# Altium PCB PCB1.PcbDoc (part 1 of 2)
Units mm, origin at the board's own origin, x right, y up, seen from the top; angles counter-clockwise.
Board outline 33.15 x 40.75 mm, 6 copper layers (Top Layer, GND, Signal Layer 3, POWER, Signal Layer 1, Bottom Layer), stack 1.231 mm thick; 110 components, 115 nets, 492 pads, 238 vias.
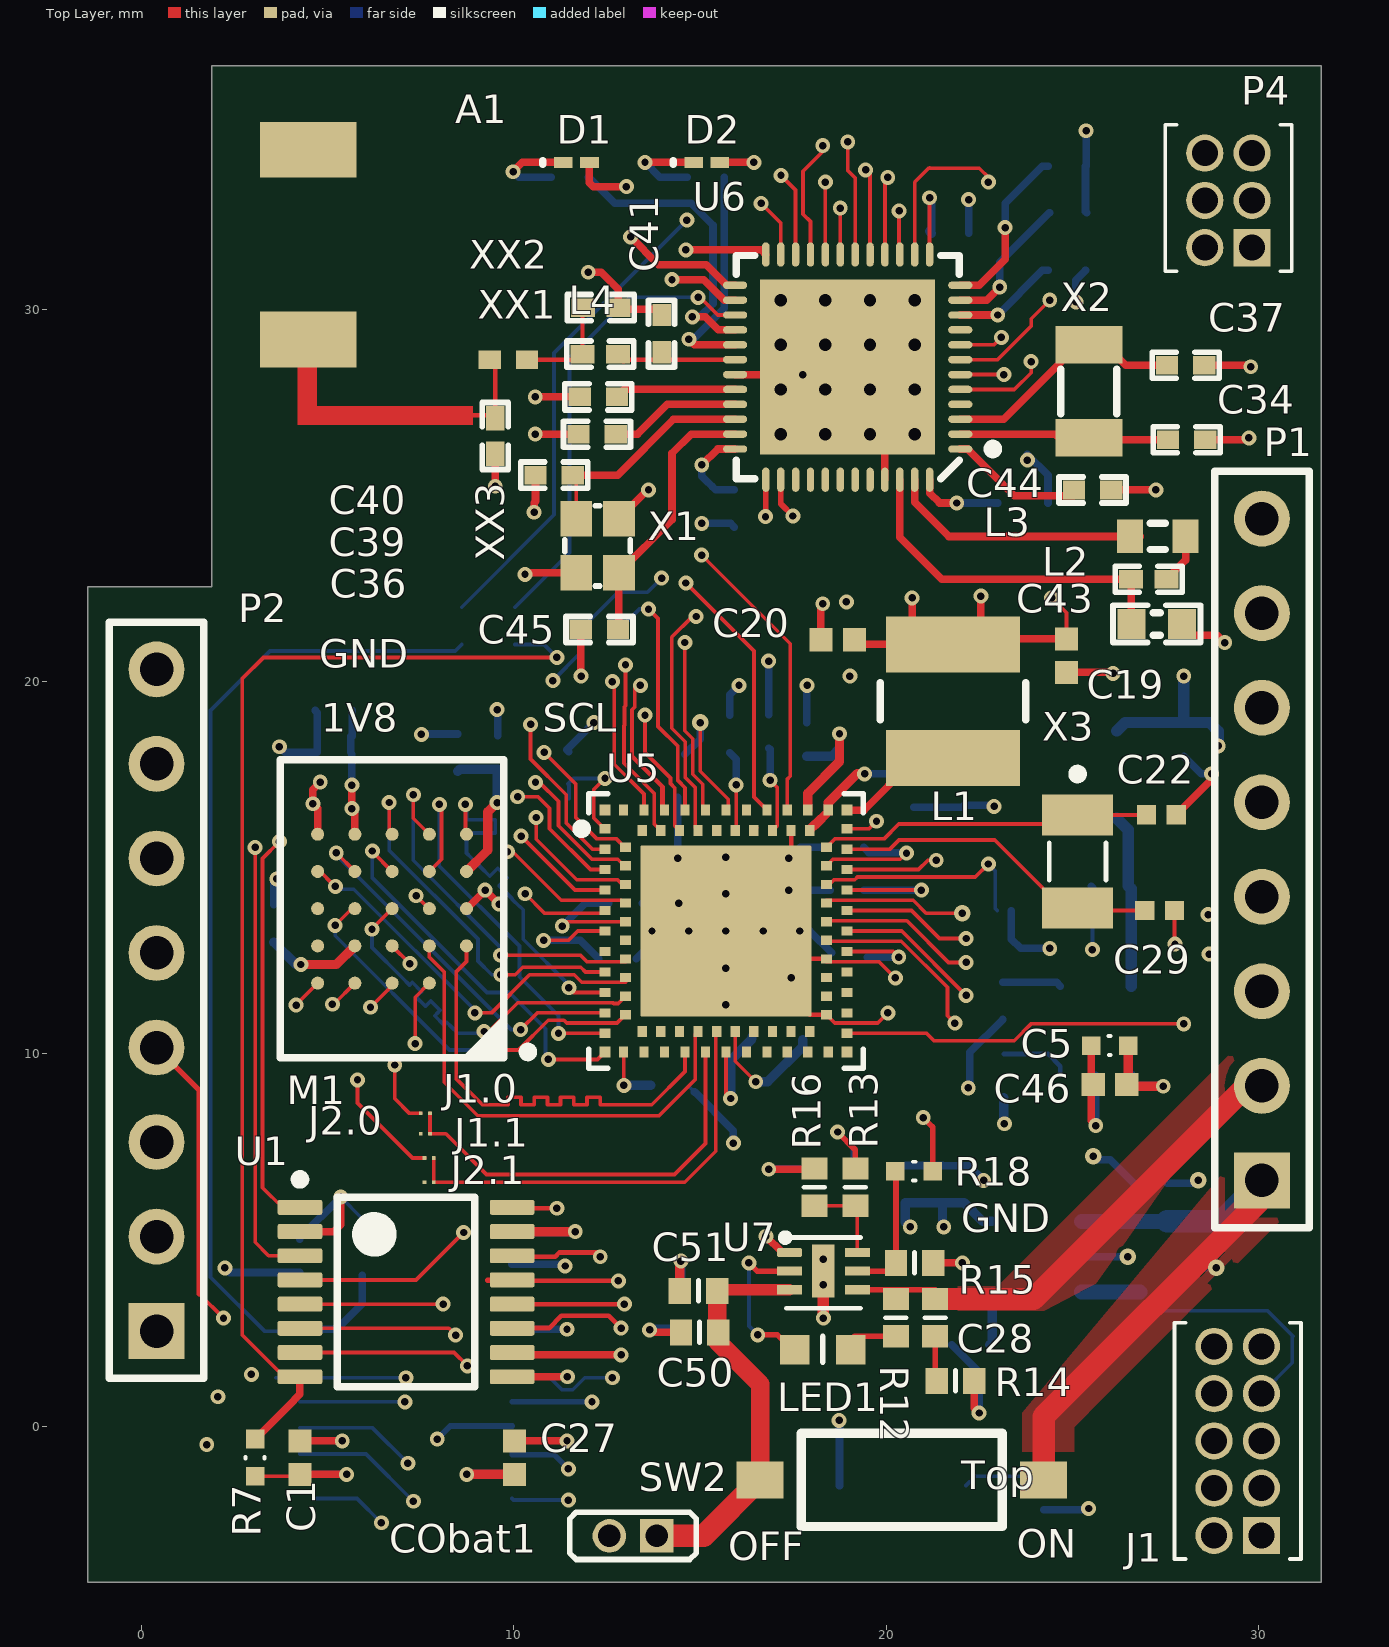
[diagram p0: Top Layer view]
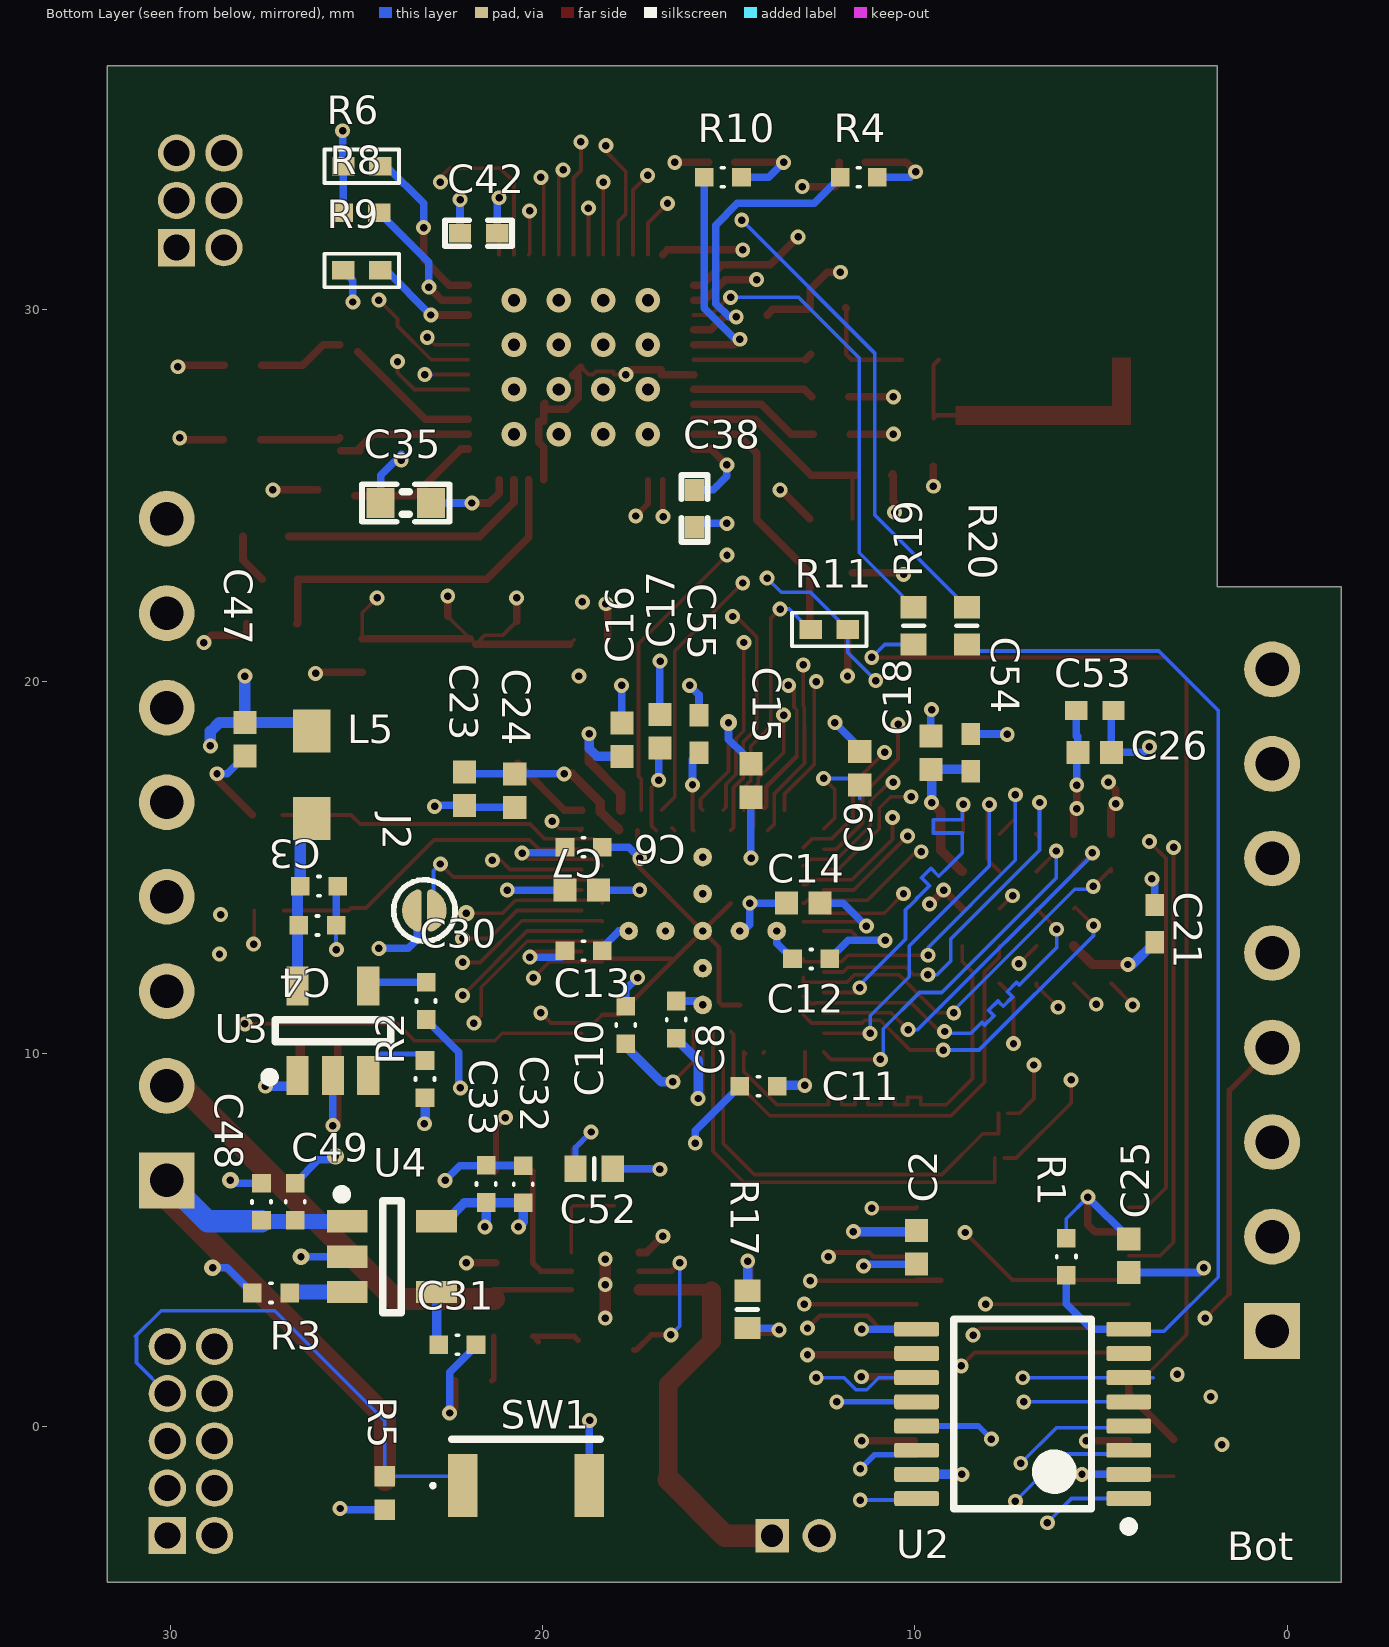
[diagram p1: Bottom Layer view, seen from below]
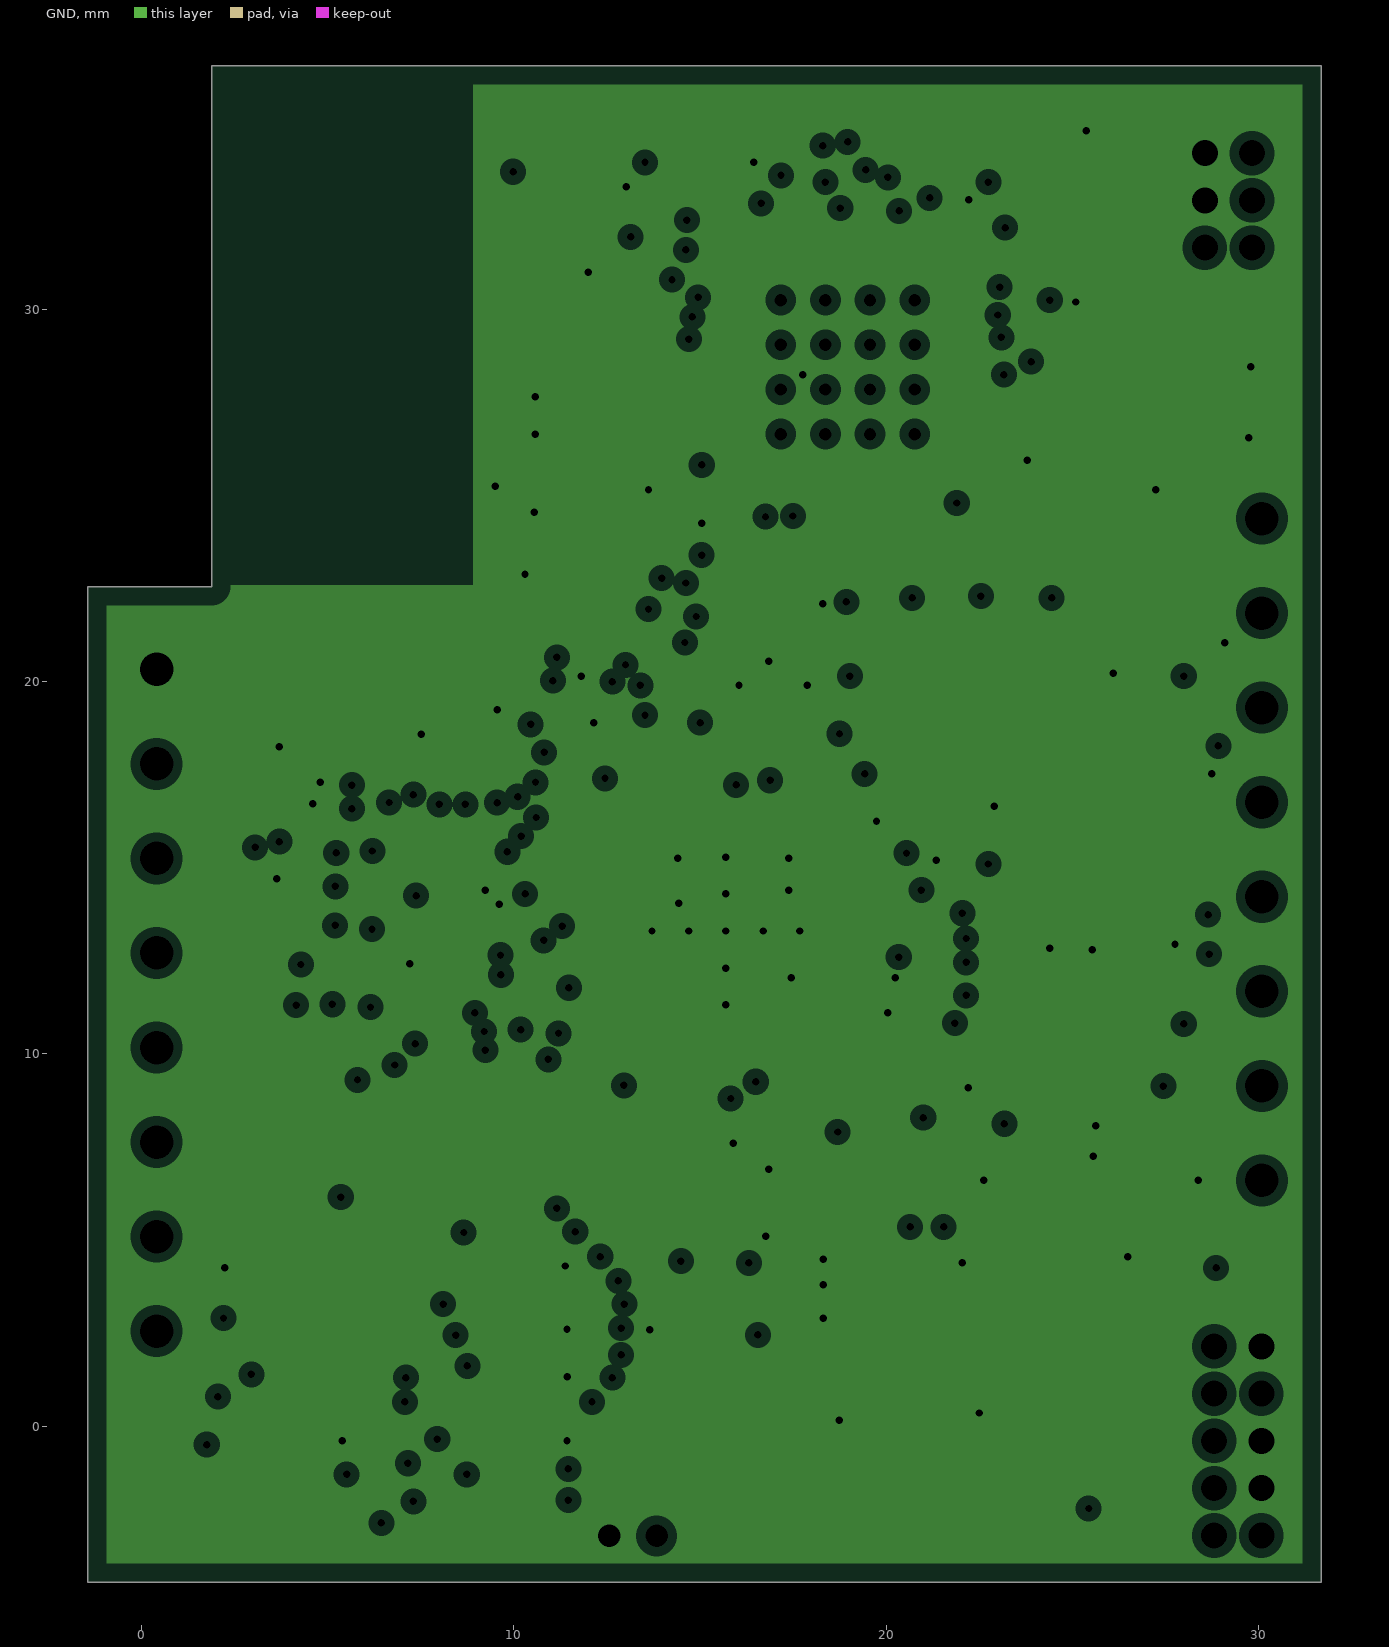
[diagram p2: GND, clearances drawn from the general rule]
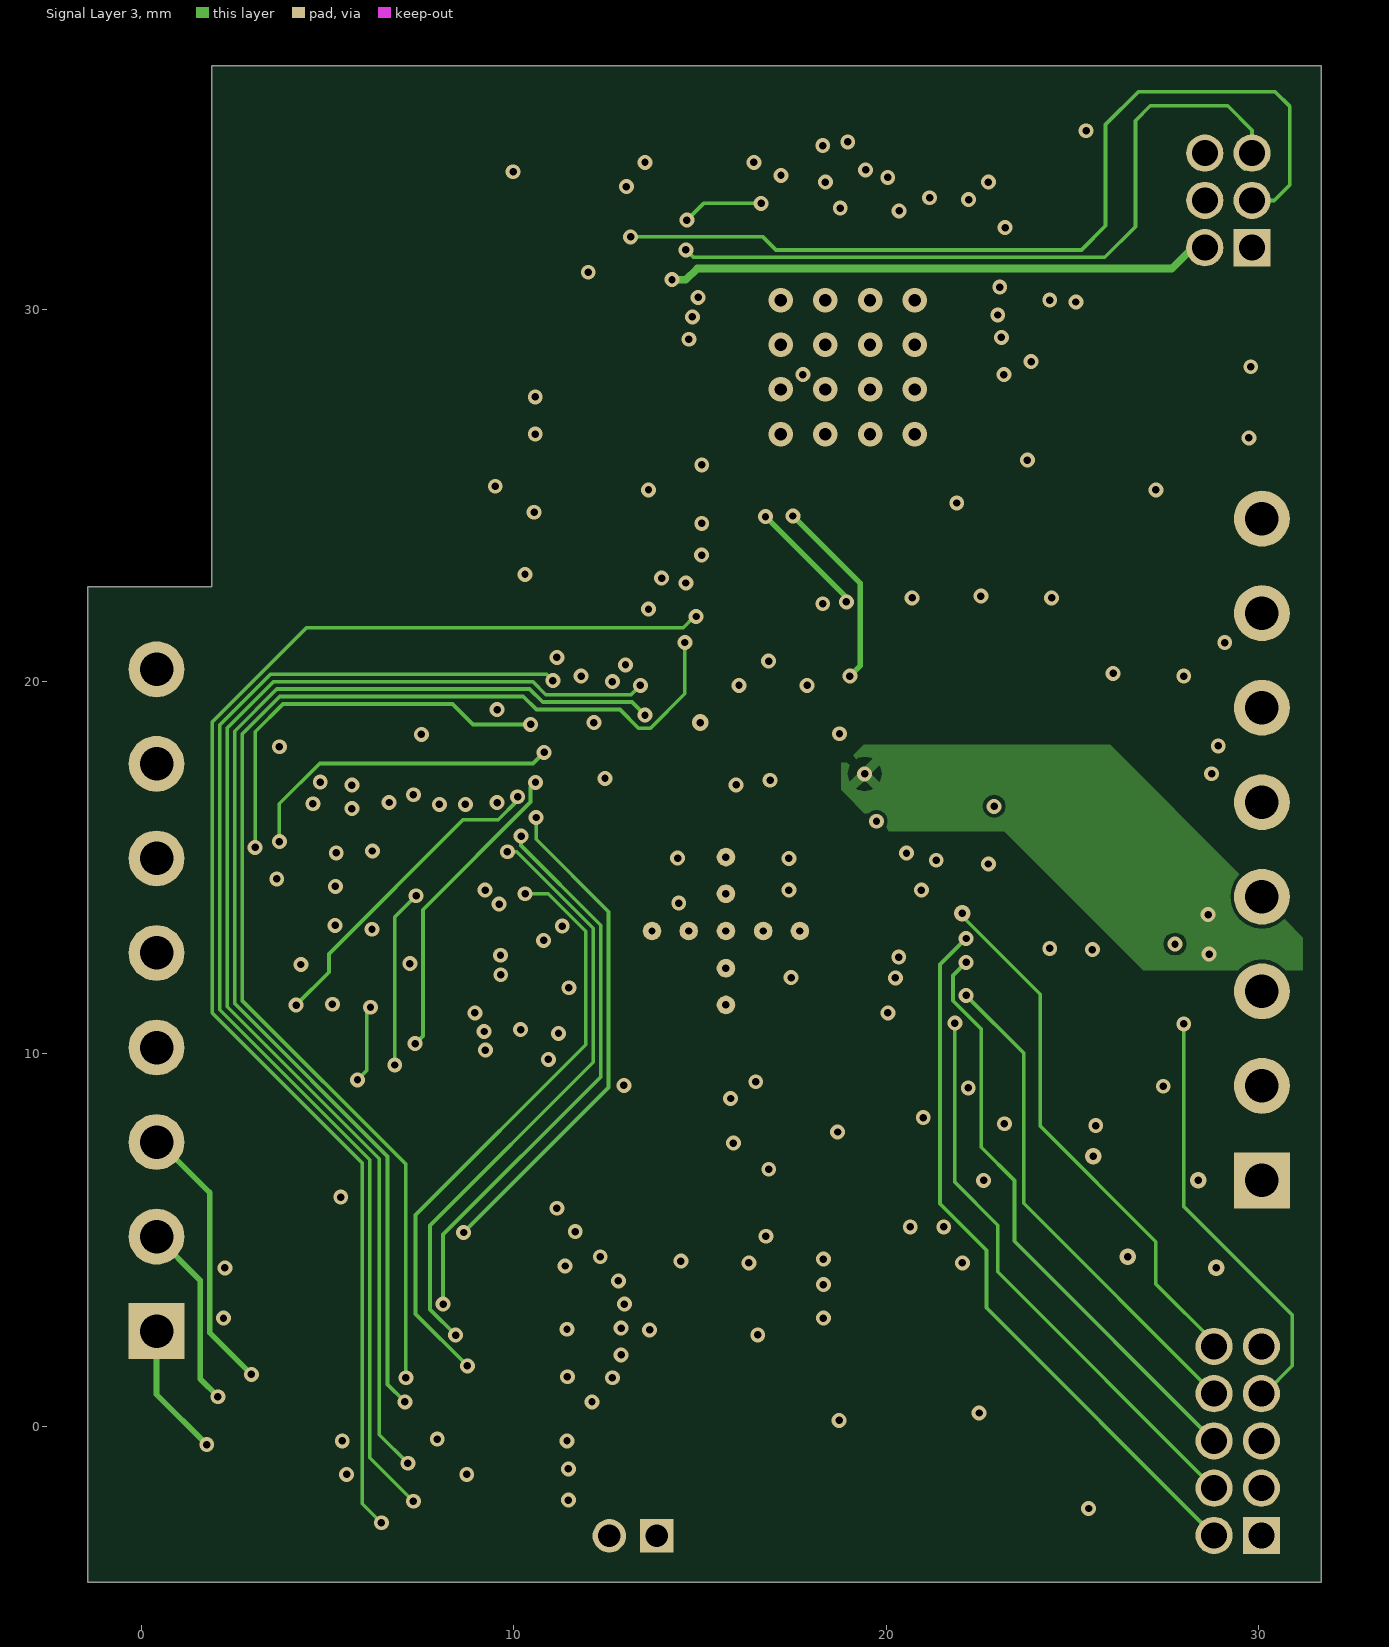
[diagram p3: Signal Layer 3]
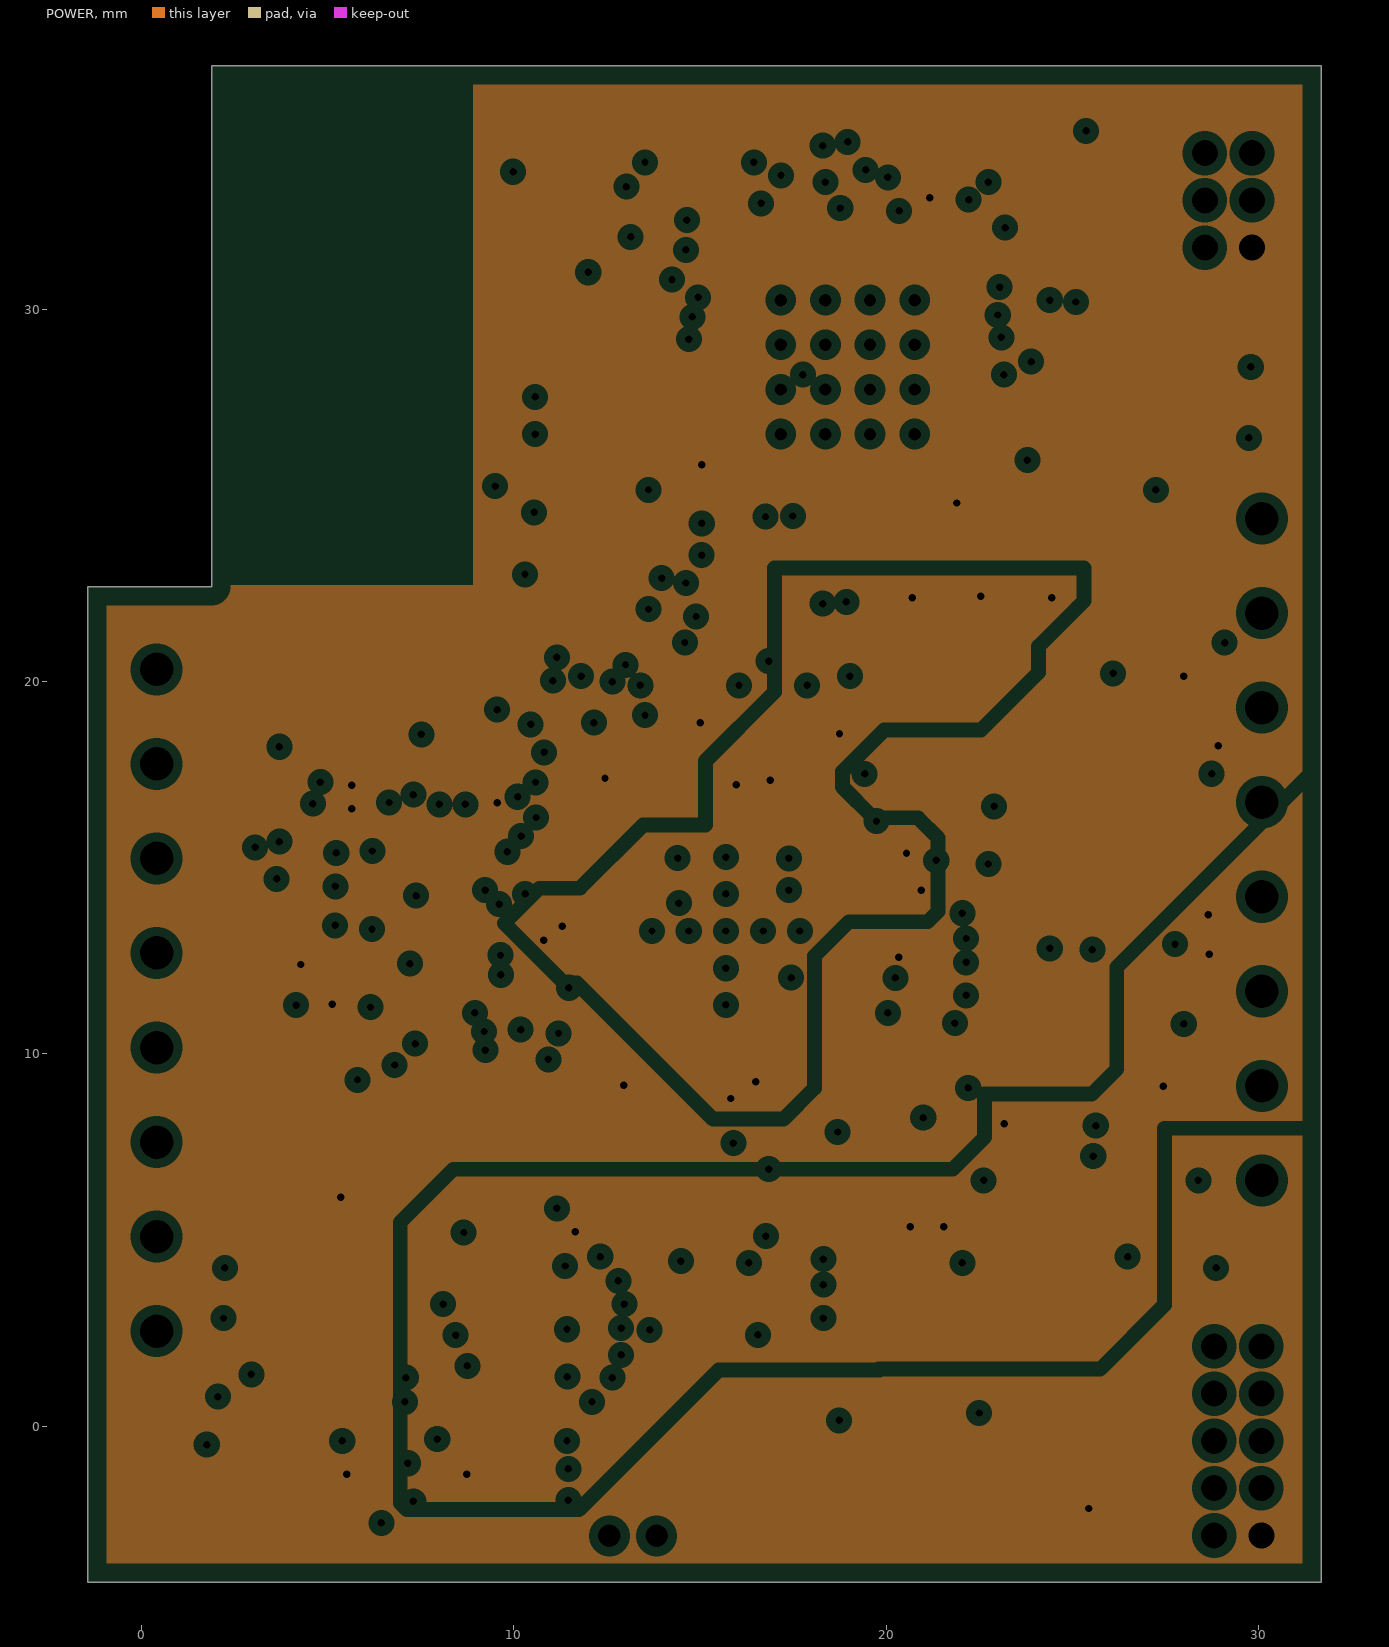
[diagram p4: POWER, clearances drawn from the general rule]
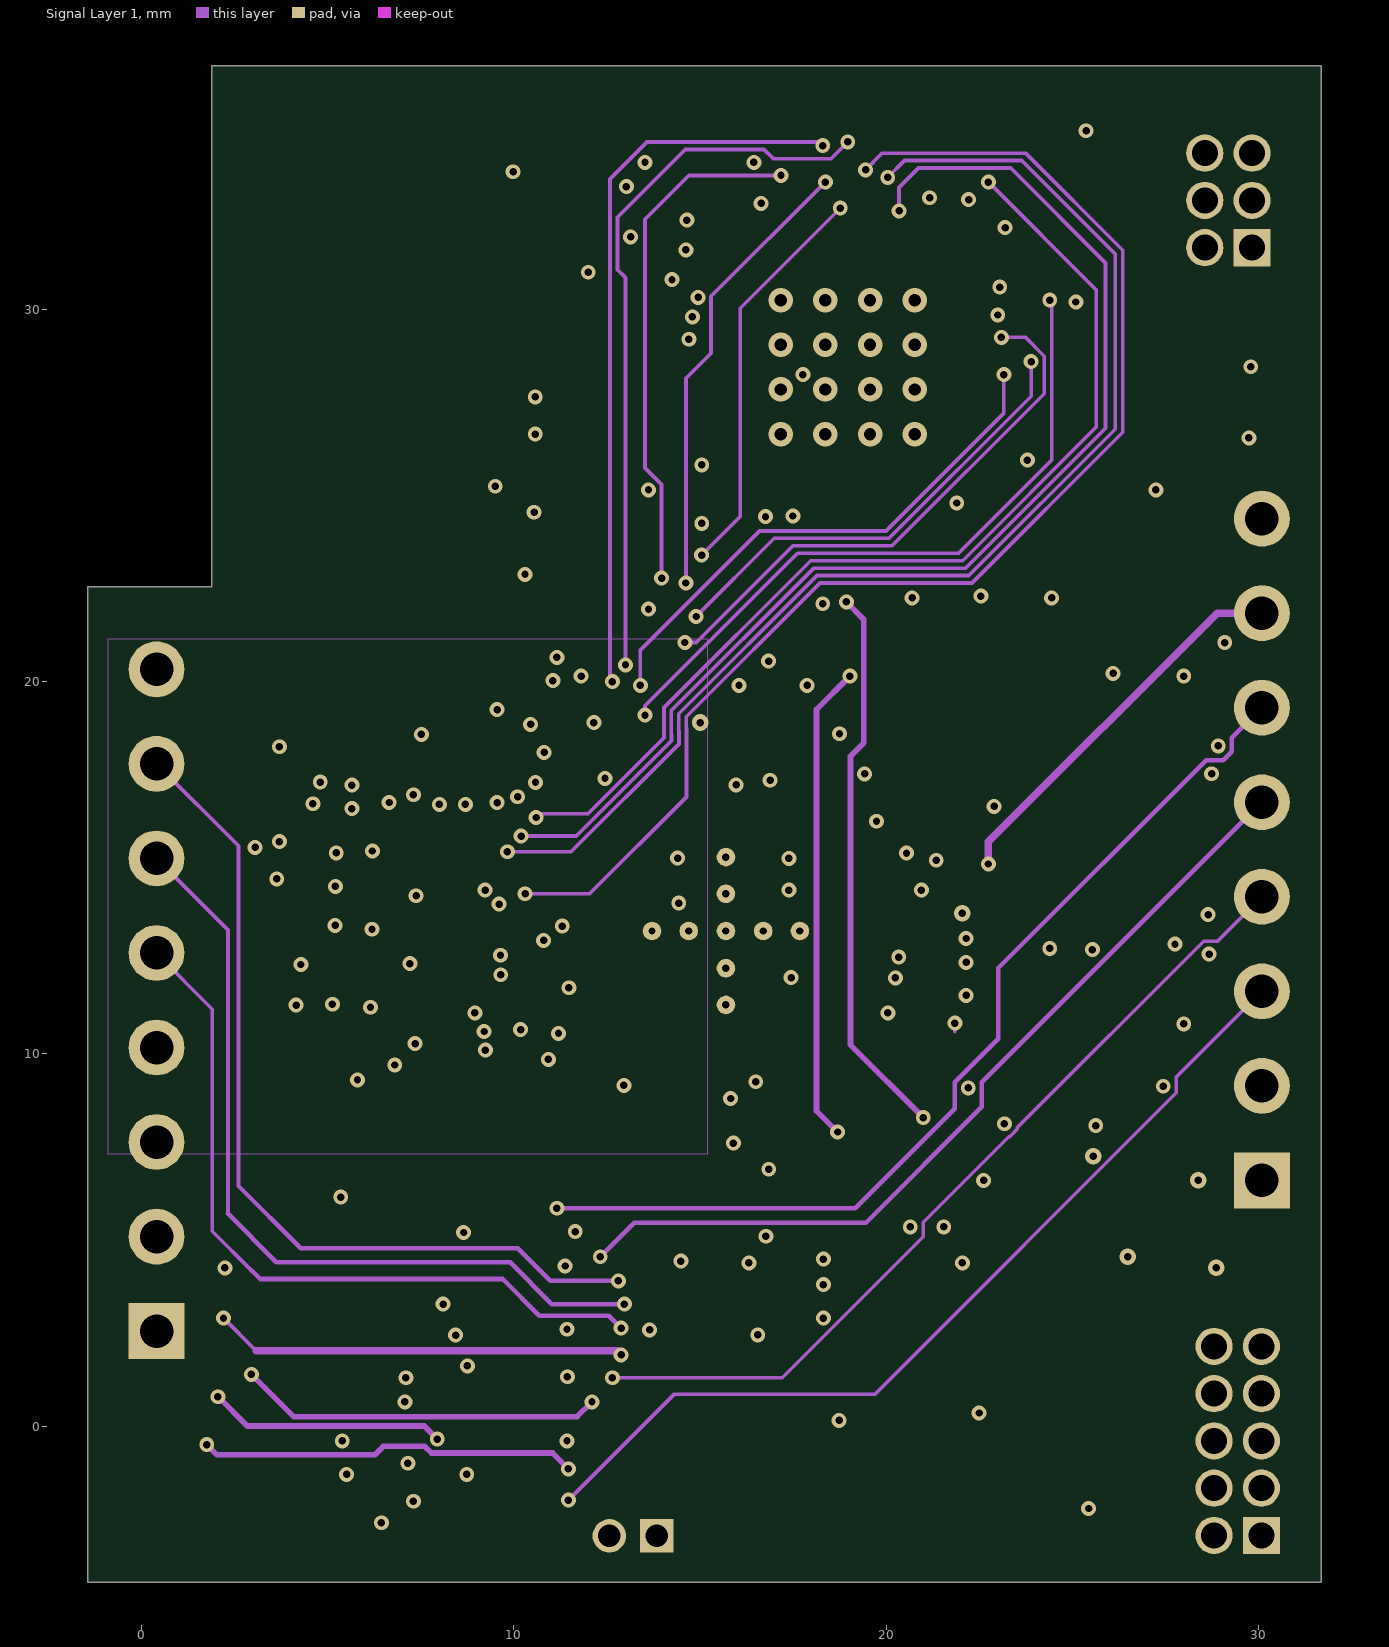
[diagram p5: Signal Layer 1]

## Layer stack, top to bottom
Top Solder: solder mask 0.0102, Solder Resist, Dk 3.5
Top Layer: signal copper 0.0356
Dielectric 1: core 0.254, FR-4, Dk 4.2
GND: plane copper 0.036, net GND
Dielectric 3: prepreg 0.127, Dk 4.2
Signal Layer 3: signal copper 0.036
Dielectric 5: core 0.254, Dk 4.2
POWER: plane copper 0.036, net (Multiple Nets)
Dielectric 2: prepreg 0.127, Dk 4.2
Signal Layer 1: signal copper 0.036
Dielectric 6: core 0.254, Dk 4.2
Bottom Layer: signal copper 0.0356
Bottom Solder: solder mask 0.0102, Solder Resist, Dk 3.5

## Board outline
-1.45,22.55 -1.45,-4.2 31.7,-4.2 31.7,36.55 1.879,36.55 1.879,22.55

## Design rules (kind name [scope] priority, off if disabled: settings)
Clearance [All] p1: gap=0.1
ComponentClearance [All] p1: gap=0.127 collisioncheckmode=3 verticalgap=0.127 showdistances=FALSE
DiffPairsRouting [InNetClass('CLOCKDIFF')] p1: maxlimit=2 minlimit=0.2 mostfreqgap=0.2 toplayer_minwidth=0.1 toplayer_maxwidth=0.35 toplayer_prefwidth=0.1 midlayer1_minwidth=0.1 midlayer1_maxwidth=0.35 midlayer1_prefwidth=0.1 midlayer2_minwidth=0.1 midlayer2_maxwidth=0.35 midlayer2_prefwidth=0.1 bottomlayer_minwidth=0.1 bottomlayer_maxwidth=0.35 bottomlayer_prefwidth=0.1 maxuncoupledlength=40
HoleSize [All] p1: absolutevalues=TRUE maxlimit=2540 minlimit=0.2 maxpercent=80.000 minpercent=20.000
HoleToHoleClearance [All] p1: gap=0.102 allowstackedmicrovias=TRUE
MatchedLengths MatchedD07 [InNetClass('D0_7')] p1: tolerance=1.27 checknetsindiffpair=FALSE checkdiffpairvsdiffpair=FALSE checkothers=TRUE
MatchedLengths [InNetClass('CLOCKDIFF')] p2: tolerance=0.254 checknetsindiffpair=FALSE checkdiffpairvsdiffpair=FALSE checkothers=TRUE
MinimumSolderMaskSliver [All] p1 off: minsoldermaskwidth=0.099
PlaneClearance [All] p1: clearance=0.25
PlaneConnect [All] p1: planeconnectstyle=Direct reliefexpansion=0.508 reliefentries=4 reliefconductorwidth=0.254 reliefairgap=0.254
PolygonConnect [All] p1: connectstyle=Relief reliefconductorwidth=0.254 reliefentries=4 polygonreliefangle="45 Angle" airgapwidth=0.254
RoutingLayers RoutingLayers_4 [All] p1: top layer_v5=TRUE mid layer 1_v5=TRUE mid layer 2_v5=TRUE bottom layer_v5=TRUE
RoutingLayers [All] p2: top layer_v5=TRUE mid layer 1_v5=TRUE mid layer 2_v5=TRUE bottom layer_v5=TRUE
RoutingVias [All] p1: holewidth=0.3 width=0.6 viastyle="Through Hole" minholewidth=0.2 minwidth=0.4 maxholewidth=0.508 maxwidth=0.762
SilkToSilkClearance [All] p1 off: silktosilkclearance=0.1
SilkToSolderMaskClearance [IsPad] p1 off: minsilkscreentomaskgap=0.1 clearancetoexposedcopper=TRUE
SolderMaskExpansion [All] p1: expansion=0.051
UnpouredPolygon [All] p1: allowunpoured=FALSE
Width [All] p1: maxlimit=3 minlimit=0.1 preferedwidth=0.15
19 further rules are at their usual default settings.

## Classes and differential pairs
net class RWDS_NET: HYPER.RWDS
component class GAPandPeripherals: C6 C7 C8 C9 C10 C11 C12 C13 C14 C15 C16 C17 C18 C19 C20 C21 C22 C23 C24 C26 C29 C53 C54 C55 J1 J1.0 J1.1 J2 J2.0 J2.1 L1 M1 R5 SW1 U5 X3
component class Power: C1 C2 C3 C4 C5 C25 C27 C30 C31 C32 C33 C46 C47 C48 C49 L5 P1 P2 R1 R2 R3 R7 U1 U2 U3 U4
net class POWER: 1V8 PULP_VCC VCOM VCOM_CF
component class Communications: A1 C34 C35 C36 C37 C38 C39 C40 C41 C42 C43 C44 C45 D1 D2 L2 L3 L4 P4 R4 R6 R8 R9 R10 R11 R18 R19 R20 U6 X1 X2 XX1 XX2 XX3
component class BatteryCharge: C28 C50 C51 C52 CObat1 LED1 R12 R13 R14 R15 R16 R17 SW2 U7
net class CLOCKDIFF: CK_N CK_P
net class D0_7: DQ0 DQ1 DQ2 DQ3 DQ4 DQ5 DQ6 DQ7 MEM_\R\S\T\O\1 MEM_INT1
differential pair CK: +CK_P -CK_N

## Components (designator, comment, footprint, x,y, rotation, side; value= is the part's Value field where it differs from the comment)
A1 "FR05-S1-N-0-102" ANTENNACHIP 4.476,29.84 r90 top
C1 "100nF" CAPC0402(1005)60_N 4.25,-0.85 r270 top
C2 "100nF" CAPC0402(1005)60_N 9.951,4.8 r270 bottom
C3 "Cap" "cap_0402_R - modified" 26.51,14.508 r180 bottom
C4 "Cap" "cap_0402_R - modified" 26.55,13.45 r180 bottom
C5 "Cap" "cap_0402_R - modified" 26.51,10.221 r180 top
C6 "100nF" "cap_0402_R - modified" 18.4,15.55 r0 bottom
C7 "100nF" CAPC0402(1005)60_N 18.95,14.4 r0 bottom
C8 "100nF" "cap_0402_R - modified" 16.409,11.42 r270 bottom
C9 "100nF" CAPC0402(1005)60_N 11.48,17.67 r270 bottom
C10 "100nF" "cap_0402_R - modified" 17.768,11.275 r270 bottom
C11 "100nF" "cap_0402_R - modified" 14.7,9.13 r180 bottom
C12 "100nF" "cap_0402_R - modified" 13.286,12.55 r180 bottom
C13 "100nF" "cap_0402_R - modified" 18.4,12.768 r0 bottom
C14 "100nF" CAPC0402(1005)60_N 13,14.05 r180 bottom
C15 "100nF" CAPC0402(1005)60_N 14.408,17.344 r90 bottom
C16 "100nF" CAPC0402(1005)60_N 17.873,18.443 r270 bottom
C17 "100nF" CAPC0402(1005)60_N 16.85,18.663 r270 bottom
C18 "100nF" CAPC0402(1005)60_N 9.57,18.094 r270 bottom
C19 "4.7uF" CAPC0402(1005)60_N 24.85,20.7 r90 top
C20 "100nF" CAPC0402(1005)60_N 18.7,21.125 r0 top
C21 "Cap Semi" 0402#1 3.55,13.5 r270 bottom
C22 "10pF" CAPC0402(1005)60_L 27.4,16.425 r180 top
C23 "4.7uF" CAPC0402(1005)60_N 22.1,17.125 r90 bottom
C24 "100nF" CAPC0402(1005)60_N 20.75,17.073 r90 bottom
C25 "100nF" CAPC0402(1005)60_N 4.254,4.575 r90 bottom
C26 "100nF" CAPC0402(1005)60_N 5.168,18.1 r0 bottom
C27 "100nF" CAPC0402(1005)60_N 10.015,-0.85 r90 top
C28 "C1005X5R1C105M050BC" 0402#2 21.317,2.913 r90 top
C29 "10pF" CAPC0402(1005)60_L 27.35,13.85 r180 top
C30 "C" "cap_0402_R - modified" 23.132,11.922 r270 bottom
C31 "Cap" "cap_0402_R - modified" 21.79,2.181 r0 bottom
C32 "Cap" "cap_0402_R - modified" 20.522,5.994 r90 bottom
C33 "Cap" "cap_0402_R - modified" 21.517,7.005 r270 bottom
C34 "12pF" CAPC1005X04L 28.077,26.5 r0 top
C35 "4.7µF" CAPC1608X06L 23.678,24.8 r0 bottom
C36 "12pF" CAPC1005X04L 11.082,25.55 r180 top
C37 "12pF" CAPC1005X04L 28.05,28.5 r0 top
C38 "100nF" CAPC1005X04L 15.922,24.65 r270 bottom
C39 "100pF" CAPC1005X04L 12.237,26.65 r180 top
C40 "N.C." CAPC1005X04L 12.272,27.65 r0 top
C41 "0.8pF" CAPC1005X04L 13.97,29.35 r270 top
C42 "100nF" CAPC1005X04L 21.722,32.05 r0 bottom
C43 "1.0µF" CAPC1608X06L 27.275,21.55 r180 top
C44 "100nF" CAPC1005X04L 25.55,25.15 r0 top
C45 "12pF" CAPC1005X04L 12.301,21.4 r180 top
C46 "Cap" CAPC0402(1005)60_N 26.017,9.172 r0 top
C47 "Cap" CAPC0402(1005)60_N 28,18.45 r90 bottom
C48 "Cap" "cap_0402_R - modified" 27.554,6.525 r270 bottom
C49 "Cap" "cap_0402_R - modified" 26.65,5.525 r90 bottom
C50 "C1005X5R1C105M050BC" 0402#2 14.99,2.519 r0 top
C51 "GRM188R6YA475KE15D" 0402#2 14.962,3.633 r0 top
C52 "GRM155R61H102KA01D" 0402#2 18.617,6.913 r0 bottom
C53 "Cap Semi" 0402#1 5.162,19.225 r0 bottom
C54 "Cap Semi" 0402#1 8.495,18.094 r270 bottom
C55 "Cap Semi" 0402#1 15.8,18.594 r270 bottom
CObat1 "Header, 2 pin" "Pin Header, 1x2, TH" 13.201,-2.95 r180 top
D1 "LED3" 0603#1 11.682,33.95 r0 top
D2 "LED3" 0603#1 15.187,33.95 r0 top
J1 "20021111-00010T4LF" 20021111-00010T4LF 29.45,-0.4 r90 top
J1.0 "Solder Jumper" UJMPR 7.75,8.4 r270 top
J1.1 "Solder Jumper" UJMPR 7.85,7.2 r270 top
J2 "Solder Jumper" "Small Solder Jumper" 23.179,13.85 r0 bottom
J2.0 "Solder Jumper" UJMPR 7.75,7.85 r270 top
J2.1 "Solder Jumper" UJMPR 7.85,6.55 r270 top
L1 "SRN4026-220M" SRN4026 21.799,19.477 r270 top
L2 "LQW15AN15NJ00D" INDC1005X04L 27.058,22.75 r0 top
L3 "L0603B100KDWFT" J1-0603 27.302,23.9 r180 top
L4 "3.9nH" INDC1005X04L 12.322,28.8 r180 top
L5 "L0603B100KDWFT" "SMD 0805_A" 26.201,17.5 r90 bottom
LED1 "Manufactrurer PN" 0603#2 18.3,2.05 r180 top
M1 "S71KS512SC0" FBGA24_A-130 6.729,13.9 r180 top
P1 "Header 8" HDR1X8 30.1,6.6 r90 top
P2 "Header 8" HDR1X8 0.4,2.55 r90 top
P4 "Header 6" MINI_6POLES_SWD 29.2,34.2 r90 top
R1 "R" "cap_0402_R - modified" 5.931,4.05 r90 bottom
R2 "R" "cap_0402_R - modified" 23.16,9.822 r270 bottom
R3 "R" "cap_0402_R - modified" 26.8,3.575 r0 bottom
R4 "Res3" "res_0402_R - modified" 12.007,33.55 r180 bottom
R5 "10K" RESC1005X40X25NL05T05 24.243,-1.8 r270 bottom
R6 "0R" 0402#1 24.86,33.85 r0 bottom
R7 "R" "cap_0402_R - modified" 3.05,-0.35 r270 top
R8 "0R" 0402#1 24.892,32.6 r0 bottom
R9 "0R" 0402#1 24.86,31.05 r0 bottom
R10 "Res3" "res_0402_R - modified" 15.658,33.55 r180 bottom
R11 "NC" 0402#1 12.301,21.4 r180 bottom
R12 "ERJ-2RKF4990X" 0402#2 20.267,2.911 r90 top
R13 "ERJ-2RKF1002X" 0402#2 19.176,6.418 r90 top
R14 "ERJ-2BQF1R0X" 0402#2 21.867,1.213 r180 top
R15 "ERJ-2RKF1004X" 0402#2 20.767,4.383 r180 top
R16 "ERJ-2RKF2001X" 0402#2 18.076,6.418 r270 top
R17 "ERJ-2BQF1R0X" 0402#2 14.5,3.133 r90 bottom
R18 "Res3" "res_0402_R - modified" 21.253,6.85 r180 top
R19 "NC" 0402#2 10.031,21.5 r270 bottom
R20 "NC" 0402#2 8.6,21.5 r90 bottom
SW1 "B3U-3000P" OMRON-B3U-3000P_V 20.45,-1.6 r180 bottom
SW2 "SWITCH_SPST" SWITCH_SPST_CHS-01TB 20.424,-1.45 r180 top
U1 "TXB0106PWR" PW0016A_L 7.104,3.6 r0 top
U2 "TXB0106PWR" PW0016A_L 7.104,0.325 r0 bottom
U3 "TPS73218" "SOT23__DDC__(R - PDSO-  G5)" 25.635,10.62 r90 bottom
U4 "TPS79333" "SOT_23__DBV_(R - PDSO - G5)" 24.05,4.549 r180 bottom
U5 "GAP8" RKC0088A_V 15.7,13.3 r0 top
U6 "nRF52832-QFAA" QFN40P600X600X90-48N 18.971,28.45 r180 top
U7 "LTC4065EDC#TRMPBF" DFN-6_LT 18.317,4.163 r270 top
X1 "FA-128 32.0000MF10Z-AJ3-ND" BT-XTAL_2016 12.25,23.65 r270 top
X2 "ABS07AIG-32.768kHz-9-1-T" XTAL_3215 25.45,27.8 r90 top
X3 "ABS07AIG-32.768kHz-9-1-T" ABRA-ABS07-2_V 25.147,15.167 r270 top
XX1 "0" 0402#1 9.856,28.65 r180 top
XX2 "NC" INDC1005X04L 12.334,30.05 r0 top
XX3 "NC" INDC1005X04L 9.499,26.6 r270 top

## Footprints (in the part's own frame and the unit in brackets; to place one, negate y for a bottom-side part, rotate by r counter-clockwise, add the part's x,y. Pads: shape width x height; smd on the part's side, far side on the other; paste and mask are expansions set on the pad)
0402#1 [mm] "Chip Capacitor, Body 1.0x0.5mm, IPC High Density"
  rect 0.6x0.5 smd: 1(-0.5,0) 2(0.5,0)
  body extent -0.55,-0.3 0.55,0.3, height 1.3
0402#2 [mm] "Chip Resistor; Body 1 x 0.5 mm (LxW typ)"
  rect 0.6x0.7 smd: 1(-0.5,0) 2(0.5,0)
  silkscreen extent 0,-0.28 0,0.28
0603#1 [mm] "Chip Inductor, Body 0.6x0.3mm, IPC High Density"
  rect 0.5x0.3 smd: 1(-0.35,0) 2(0.35,0)
  silkscreen extent -0.9,-0.05 -0.9,0.05, body extent -0.33,-0.18 0.33,0.18, height 0.55
0603#2 [mm]
  rect 0.8x0.8 smd: 1(-0.75,0) 2(0.75,0)
  silkscreen extent 0,-0.36 0,0.33, body extent -0.91,-0.36 0.94,0.36, height 0.4
20021111-00010T4LF [mm] "Terminal Assembly, 2x5 Pin, Vertical, 1.27mm Pitch, Male"
  rect 1x1 hole 0.7: 1(-2.54,-0.635)
  round 1 hole 0.7: 2(-2.54,0.635) 3(-1.27,-0.635) 4(-1.27,0.635) 5(0,-0.635) 6(0,0.635) 7(1.27,-0.635) 8(1.27,0.635) 9(2.54,-0.635) 10(2.54,0.635)
  silkscreen extent -3.17,-1.7 3.18,1.7, body extent -3.17,-1.7 3.18,1.7, height 5.51
ABRA-ABS07-2_V [mm] "Crystal, 2-Leads, Body 3.2x1.5mm, Pitch 2.5mm"
  rect 1.1x1.9 smd: 1(-1.25,0) 2(1.25,0)
  silkscreen extent -2.47,-0.76 0.51,0.76, body extent -1.6,-0.75 1.6,0.75, height 0.9
ANTENNACHIP [mm] "Chip ANTENNA SMD"
  rect 1.5x2.6 smd: 1(-0.65,0) 2(4.45,0)
BT-XTAL_2016 [mm]
  rect 0.95x0.85 smd: 1(-0.725,-0.575) 2(0.725,-0.575) 3(0.725,0.575) 4(-0.725,0.575)
  silkscreen extent -1.08,-0.88 1.08,0.88, body extent -1.05,-0.85 1.05,0.85, height 0.56
"cap_0402_R - modified" [mm] "0402_R"
  rect 0.5x0.5 smd paste-0.05: 1(0,0) 2(1,0)
  silkscreen extent 0.47,-0.26 0.53,0.25, body extent -0.13,-0.25 1.14,0.25, height 0.5
CAPC0402(1005)60_L [mm] "Chip Capacitor, Body 1.0x0.5mm, Height 0.6mm, IPC High Density"
  rect 0.52x0.52 smd: 1(-0.4,0) 2(0.4,0)
  body extent -0.55,-0.3 0.55,0.3, height 0.6
CAPC0402(1005)60_N [mm] "Chip Capacitor, Body 1.0x0.5mm, Height 0.6mm, IPC Medium Density"
  rect 0.62x0.62 smd: 1(-0.45,0) 2(0.45,0)
  body extent -0.55,-0.3 0.55,0.3, height 0.6
CAPC1005X04L [mm]
  rect 0.6x0.5 smd: 1(-0.5,0) 2(0.5,0)
  silkscreen extent -0.9,-0.35 0.9,0.35, body extent -0.51,-0.25 0.51,0.25, height 0.5
CAPC1608X06L [mm]
  rect 0.75x0.8 smd: 1(-0.675,0) 2(0.675,0)
  silkscreen extent -1.17,-0.5 1.17,0.5, body extent -0.8,-0.43 0.8,0.43, height 0.8
DFN-6_LT [mm]
  rrect50% 0.25x0.675 smd paste-0.05 mask+0.05: 1(-0.5,-0.913)
  rect 0.25x0.675 smd paste-0.05 mask+0.05: 2(0,-0.913) 3(0.5,-0.913) 4(0.5,0.913) 5(0,0.913) 6(-0.5,0.913)
  rect 1.42x0.61 smd paste-0.05 mask+0.05: 7(0,0)
  silkscreen extent -0.97,-1.09 1,1, body extent -0.87,-1 1,1, height 0.75
FBGA24_A-130 [mm] "BGA, 24-Balls, Body 8x6mm, Pitch 1mm, A1 missing"
  round 0.35 smd paste-0.5: A2(-1,2) A3(0,2) A4(1,2) A5(2,2) B1(-2,1) B2(-1,1) B3(0,1) B4(1,1) B5(2,1) C1(-2,0) C2(-1,0) C3(0,0) C4(1,0) C5(2,0) D1(-2,-1) D2(-1,-1) D3(0,-1) D4(1,-1) D5(2,-1) E1(-2,-2) E2(-1,-2) E3(0,-2) E4(1,-2) E5(2,-2)
  silkscreen extent -3.78,-4 3,4, body extent -3,-4 3,4, height 1.3
HDR1X8 [mm] "Connector; Header; 8 Position"
  rect 1.5x1.5 hole 0.9: 1(0,0)
  round 1.5 hole 0.9: 2(2.54,0) 3(5.08,0) 4(7.62,0) 5(10.16,0) 6(12.7,0) 7(15.24,0) 8(17.78,0)
  silkscreen extent -1.27,-1.27 19.05,1.27
INDC1005X04L [mm]
  rect 0.65x0.5 smd: 1(-0.475,0) 2(0.475,0)
  silkscreen extent -0.9,-0.35 0.9,0.35, body extent -0.5,-0.3 0.5,0.3, height 0.5
J1-0603 [mm] "Chip Resistor, Body 1.6x0.8mm, IPC High Density"
  rect 0.7x0.9 smd: 1(-0.75,0) 2(0.75,0)
  silkscreen extent -0.2,-0.35 0.2,0.35, body extent -0.85,-0.48 0.85,0.48, height 0.9
MINI_6POLES_SWD [mm] "Terminal Assembly, 2x5 Pin, Vertical, 1.27mm Pitch, Male"
  rect 1x1 hole 0.7: 1(-2.54,-0.635)
  round 1 hole 0.7: 2(-2.54,0.635) 3(-1.27,-0.635) 4(-1.27,0.635) 5(0,-0.635) 6(0,0.635)
  silkscreen extent -3.17,-1.7 0.76,1.7, body extent -3.43,-1.65 1.27,1.78, height 0.51
OMRON-B3U-3000P_V [mm] "SMD, 2-Leads, Body 4x3.2mm"
  rect 0.8x1.7 smd: 1(-1.7,0) 2(1.7,0)
  silkscreen extent -2.55,-0.05 2,1.25, body extent -2,-1.95 2,1.25, height 1.2
"Pin Header, 1x2, TH" [mm] "Terminal Assembly, 1x2 Pins, Vertical, 1.27mm Pitch, Male, TH"
  rect 0.9x0.9 hole 0.6: 1(-0.635,0)
  round 0.9 hole 0.6: 2(0.635,0)
  silkscreen extent -1.7,-0.63 1.7,0.64, body extent -1.7,-0.63 1.7,0.64, height 6.3
PW0016A_L [mm] "SOP, 16-Leads, Body 5.1x4.5mm, Pitch 0.65mm, IPC High Density"
  rrect25% 1.2x0.4 smd: 1(-2.85,2.275) 2(-2.85,1.625) 3(-2.85,0.975) 4(-2.85,0.325) 5(-2.85,-0.325) 6(-2.85,-0.975) 7(-2.85,-1.625) 8(-2.85,-2.275) 9(2.85,-2.275) 10(2.85,-1.625) 11(2.85,-0.975) 12(2.85,-0.325) 13(2.85,0.325) 14(2.85,0.975) 15(2.85,1.625) 16(2.85,2.275)
  silkscreen extent -2.97,-2.55 1.85,3.15, body extent -3.21,-2.5 3.21,2.5, height 1
QFN40P600X600X90-48N [mm]
  oval 0.65x0.2 smd: 1(-3.025,2.2) 2(-3.025,1.8) 3(-3.025,1.4) 4(-3.025,1) 5(-3.025,0.6) 6(-3.025,0.2) 7(-3.025,-0.2) 8(-3.025,-0.6) 9(-3.025,-1) 10(-3.025,-1.4) 11(-3.025,-1.8) 12(-3.025,-2.2) 25(3.025,-2.2) 26(3.025,-1.8) 27(3.025,-1.4) 28(3.025,-1) 29(3.025,-0.6) 30(3.025,-0.2) 31(3.025,0.2) 32(3.025,0.6) 33(3.025,1) 34(3.025,1.4) 35(3.025,1.8) 36(3.025,2.2)
  oval 0.2x0.65 smd: 13(-2.2,-3.025) 14(-1.8,-3.025) 15(-1.4,-3.025) 16(-1,-3.025) 17(-0.6,-3.025) 18(-0.2,-3.025) 19(0.2,-3.025) 20(0.6,-3.025) 21(1,-3.025) 22(1.4,-3.025) 23(1.8,-3.025) 24(2.2,-3.025) 37(2.2,3.025) 38(1.8,3.025) 39(1.4,3.025) 40(1,3.025) 41(0.6,3.025) 42(0.2,3.025) 43(-0.2,3.025) 44(-0.6,3.025) 45(-1,3.025) 46(-1.4,3.025) 47(-1.8,3.025) 48(-2.2,3.025)
  rect 4.7x4.7 smd: 49(0,0)
  silkscreen extent -4.03,-3 3,3, body extent -3.02,-3.02 3.02,3.02, height 0.86
"res_0402_R - modified" [mm] "0402_R"
  rect 0.5x0.5 smd paste-0.05: 1(0,0) 2(1,0)
  silkscreen extent 0.46,-0.25 0.54,0.25, body extent -0.13,-0.25 1.14,0.25, height 0.3
RESC1005X40X25NL05T05 [mm] "Chip Resistor, 2-Leads, Body 1.05x0.55mm, IPC Medium Density"
  rect 0.55x0.55 smd: 1(-0.45,0) 2(0.45,0)
  body extent -0.53,-0.28 0.52,0.28, height 0.4
RKC0088A_V [mm] "QFN, 88-Leads, Body 7x7mm, Pitch 0.55mm, Thermal Pad 4.6x4.6mm, TI Recommend"
  rect 0.3x0.249 smd mask+0.035: A1(-3.25,2.75) A2(-3.25,2.2) A3(-3.25,1.65) A4(-3.25,1.1) A5(-3.25,0.55) A6(-3.25,0) A7(-3.25,-0.55) A8(-3.25,-1.1) A9(-3.25,-1.65) A10(-3.25,-2.2) A11(-3.25,-2.75) A23(3.25,-2.75) A24(3.25,-2.2) A25(3.25,-1.65) A26(3.25,-1.1) A27(3.25,-0.55) A28(3.25,0) A29(3.25,0.55) A30(3.25,1.1) A31(3.25,1.65) A32(3.25,2.2) A33(3.25,2.75) B1(-2.7,2.25) B2(-2.7,1.75) B3(-2.7,1.25) B4(-2.7,0.75) B5(-2.7,0.25) B6(-2.7,-0.25) B7(-2.7,-0.75) B8(-2.7,-1.25) B9(-2.7,-1.75) B10(-2.7,-2.25) B21(2.7,-2.25) B22(2.7,-1.75) B23(2.7,-1.25) B24(2.7,-0.75) B25(2.7,-0.25) B26(2.7,0.25) B27(2.7,0.75) B28(2.7,1.25) B29(2.7,1.75) B30(2.7,2.25)
  rect 0.249x0.3 smd mask+0.035: A12(-2.75,-3.25) A13(-2.2,-3.25) A14(-1.65,-3.25) A15(-1.1,-3.25) A16(-0.55,-3.25) A17(0,-3.25) A18(0.55,-3.25) A19(1.1,-3.25) A20(1.65,-3.25) A21(2.2,-3.25) A22(2.75,-3.25) A34(2.75,3.25) A35(2.2,3.25) A36(1.65,3.25) A37(1.1,3.25) A38(0.55,3.25) A39(0,3.25) A40(-0.55,3.25) A41(-1.1,3.25) A42(-1.65,3.25) A43(-2.2,3.25) A44(-2.75,3.25) B11(-2.25,-2.7) B12(-1.75,-2.7) B13(-1.25,-2.7) B14(-0.75,-2.7) B15(-0.25,-2.7) B16(0.25,-2.7) B17(0.75,-2.7) B18(1.25,-2.7) B19(1.75,-2.7) B20(2.25,-2.7) B31(2.25,2.7) B32(1.75,2.7) B33(1.25,2.7) B34(0.75,2.7) B35(0.25,2.7) B36(-0.25,2.7) B37(-0.75,2.7) B38(-1.25,2.7) B39(-1.75,2.7) B40(-2.25,2.7)
  rect 0.3x0.3 smd mask+0.035: D1(-3.25,3.25) D2(-3.25,-3.25) D3(3.25,-3.25) D4(3.25,3.25)
  round 0.5 hole 0.2 mask+0.035: PAD(-1.987,0) PAD(-1,0) PAD(0,-1.987) PAD(0,-1) PAD(0,0) PAD(0,1) PAD(0,1.987) PAD(1,0) PAD(1.987,0)
  rrect36% 0.275x1.7 smd mask+0.035: PAD(-1.987,-1) PAD(-1.987,1) PAD(1.987,-1) PAD(1.987,1)
  rrect36% 1.7x0.275 smd mask+0.035: PAD(-1,-1.987) PAD(-1,1.987) PAD(1,-1.987) PAD(1,1.987)
  rrect2% 4.6x4.6 smd paste-5 mask+0.035: PAD(0,0)
  silkscreen extent -4,-3.68 3.68,3.68, body extent -3.5,-3.5 3.5,3.5, height 0.95
"Small Solder Jumper" [mm] "Small Solder Jumper (shortcut with a drop of tin if needed)"
  round 0.525 smd paste-5 mask+0: 1(-0.337,0) 2(0.337,0)
  oval 0.52x0.63 smd paste-5 mask+0: 1(-0.335,0) 2(0.335,0)
  oval 0.51x0.71 smd paste-5 mask+0: 1(-0.33,0) 2(0.33,0)
  oval 0.5x0.76 smd paste-5 mask+0: 1(-0.325,0) 2(0.325,0)
  oval 0.49x0.8 smd paste-5 mask+0: 1(-0.32,0) 2(0.32,0)
  oval 0.475x0.84 smd paste-5 mask+0: 1(-0.312,0) 2(0.312,0)
  oval 0.465x0.865 smd paste-5 mask+0: 1(-0.308,0) 2(0.308,0)
  oval 0.45x0.897 smd paste-5 mask+0: 1(-0.3,0) 2(0.3,0)
  oval 0.425x0.943 smd paste-5 mask+0: 1(-0.288,0) 2(0.288,0)
  oval 0.4x0.981 smd paste-5 mask+0: 1(-0.275,0) 2(0.275,0)
  oval 0.375x1.013 smd paste-5 mask+0: 1(-0.262,0) 2(0.262,0)
  oval 0.35x1.04 smd paste-5 mask+0: 1(-0.25,0) 2(0.25,0)
  oval 0.325x1.063 smd paste-5 mask+0: 1(-0.238,0) 2(0.238,0)
  oval 0.3x1.082 smd paste-5 mask+0: 1(-0.225,0) 2(0.225,0)
  oval 0.275x1.098 smd paste-5 mask+0: 1(-0.212,0) 2(0.212,0)
  oval 0.25x1.112 smd paste-5 mask+0: 1(-0.2,0) 2(0.2,0)
  oval 0.225x1.125 smd paste-5 mask+0: 1(-0.188,0) 2(0.188,0)
  oval 0.2x1.137 smd paste-5 mask+0: 1(-0.175,0) 2(0.175,0)
  silkscreen extent -0.82,-0.83 0.83,0.83
"SMD 0805_A" [mm] "Chip Inductor, 2-Leads, Body 2,0x1,2mm"
  rect 1.15x1 smd: 1(-1.175,0) 2(1.175,0)
  body extent -1,-0.6 1,0.6, height 0.89
"SOT23__DDC__(R - PDSO-  G5)" [mm]
  rect 1.05x0.6 smd: 1(-1.2,0.95) 2(-1.2,0) 3(-1.2,-0.95) 4(1.2,-0.95) 5(1.2,0.95)
  silkscreen extent -1.37,-1.55 0.3,1.83, body extent -0.87,-1.52 0.87,1.53, height 1.1
"SOT_23__DBV_(R - PDSO - G5)" [mm]
  rect 1.1x0.6 smd: 1(-1.2,0.95) 2(-1.2,0) 3(-1.2,-0.95) 4(1.2,-0.95) 5(1.2,0.95)
  silkscreen extent -1.47,-1.5 0.25,1.8, body extent -0.85,-1.5 0.85,1.5, height 1.45
SRN4026 [mm] "Semi-Shielded Wirewound Inductor"
  rect 1.5x3.6 smd: 1(-1.525,0) 2(1.525,0)
  silkscreen extent -0.5,-1.95 0.5,1.95, body extent -1.95,-1.95 1.95,1.96, height 2.11
SWITCH_SPST_CHS-01TB [mm] "One bit SPST DIP switch, gull wing"
  rect 1.27x1 smd: 1(-3.81,0) 2(3.81,0)
  silkscreen extent -2.7,-1.25 2.7,1.25, body extent -2.7,-1.25 2.7,1.25, height 2.5
UJMPR [mm] "Micro Jumper"
  rect 0.1x0.1 smd: 1(0,0) 2(0,-0.25)
XTAL_3215 [mm]
  rect 1x1.8 smd: 1(-1.25,0) 2(1.25,0)
  silkscreen extent -0.6,-0.75 0.6,0.75, body extent -1.6,-0.75 1.6,0.75, height 0.81

## Part data
A1: "Bluetooth antenna"
C1 C2 C6 C7 C8 C9 C10 C11 C12 C13 C14 C15 C16 C17 C18 C20 C24 C25 C26 C27: library part CMP-1034-02065-1, "CAP 100nF 10V ±10% 0402 (1005 Metric) Thickness 0.6mm SMD"
C3 C4 C5 C31 C32 C33 C46 C47 C48 C49: "Capacitor"
C19 C23: library part CMP-1034-02137-1, "CAP 4.7uF 6.3V ±20% 0402 (1005 Metric) Thickness 0.6mm SMD"
C21 C53 C54 C55: "Capacitor (Semiconductor SIM Model)"
C22 C29: library part CMP-1034-00722-1, "CAP 10pF 50V ±2% 0402 (1005 Metric) Thickness 0.6mm SMD"
C28 C50: library part Cap, "CAP CER 1UF 16V X5R 0402"
C30: library part Cap, "Capacitor"
C34 C36 C37 C45: library part C0402-12p, "Capacitor, NP0, ±2%"
C35: library part C0603-4µ7, "Capacitor, X5R, ±10%"
C38 C42 C44: library part C0402-100n, "Capacitor, X7R, ±10%"
C39: library part C0402-100p, "Capacitor, NP0, ±5%"
C40: library part C0402-N.C., "Not mounted"
C41: library part C0402-0.8p, "Capacitor, NP0, ±5%"
C43: library part C0603-1µ0, "Capacitor, X7R, ±10%"
C51: library part Cap, "CAP CER 4.7UF 35V X5R 0603"
C52: library part Cap, "CAP CER 1000PF 50V X5R 0402"
CObat1: "Header 1x2"
D1 D2: "Typical BLUE SiC LED"
J1: library part CON-5x2-Male, "CONN HEADER VERT 10POS 1.27MM"
L1: library part CMP-00905-1, "Inductor Power Semi-Shielded Wirewound 22uH 20% 100KHz 11Q-Factor Ferrite 670mA 234mOhm DCR 1515 T/R"
L2: library part L0402-15n, "High frequency chip inductor ±10%"
L3: library part L0603-10µ, "Chip inductor, IDC,min = 50 mA, ±20%"
L4: library part L0402-3n9, "High frequency chip inductor ±5%"
L5: "Power Multilayer Inductor WE-PMI, L=2.20 µH"
LED1: library part LED, "LED RED CLEAR 0603 SMD"
M1: library part CMP-00514-2, "IC 512MB FLASH 64MB DRAM 24FBGA"
P1 P2: "Header, 8-Pin"
P4: "Header, 6-Pin"
R1 R2 R3 R7: library part Res2, "Resistor"
R4 R10 R18: "Resistor"
R5: library part CMP-2002-00607-3, "Chip Resistor, 10 KOhm, +/- 1%, 100 mW, -55 to 155 degC, 0402 (1005 Metric), RoHS, Tape and Reel"
R6 R8 R9 R11 R19 R20 XX1: library part Res3, "Resistor"
R12: library part Resistor, "RES SMD 499 OHM 1% 1/10W 0402"
R13: library part Resistor, "RES SMD 10K OHM 1% 1/10W 0402"
R14 R17: library part Resistor, "RES SMD 1 OHM 1% 1/6W 0402"
R15: library part Resistor, "RES SMD 1M OHM 1% 1/10W 0402"
R16: library part Resistor, "RES SMD 2K OHM 1% 1/10W 0402"
SW1: library part CMP-1677-00003-1, "Ultra-Small Tactile Switch, 1 to 50 mA, 3 to 12 V, -25 to 70 degC, 2-Pin SMD, RoHS, Tape and Reel"
SW2: "SWITCH SLIDE DIP SPST 100MA 6V"
U1 U2: library part TI-TXB0106-TSSOP_PW-16, "6-Bit Bidirectional Level-Shifting and Voltage Translator with Auto-Direction Sensing and +/- 15-kV ESD Protection, 1.2 to 3.6 V, -40 to 85 degC, 16-Pin TSSOP (PW), Green (RoHS & no Sb/Br), Tape and Reel"
U3: library part TPS73225, "Linear Regulator"
U4: "Regulator"
U5: library part CMP-01034-2
U6: library part nRF52832-QFAB, "Multi-protocol Bluetooth Low Energy, ANT and 2.4GHz proprietary system-on-chip"
U7: library part LTC4065EDC, "IC CHARGER BATT LI-ON 6-DFN"
X1: library part XTAL_SMD2016_32MHz_8pF_General, "XTAL SMD 2016, 32MHz, Cl=8pF, Total Tol: ±40ppm"
X2: library part XTAL_SMD3215_32.768kHz_9pF_General, "XTAL SMD 3215, 32.768kHz, Cl=9pF, Total Tol: ±50ppm"
X3: "XTAL SMD 3215, 32.768kHz, Cl=9pF, Total Tol: ±50ppm"
XX2 XX3: library part L0402-N.C., "Not mounted"

## Via types
v1: diameter 0.4, hole 0.2, Top Layer to Bottom Layer, tented both sides, 130 vias
v2: diameter 0.4, hole 0.2, Top Layer to Bottom Layer, 86 vias
v3: diameter 0.66, hole 0.33, Top Layer to Bottom Layer, 16 vias
v4: diameter 0.45, hole 0.2, Top Layer to Bottom Layer, 5 vias
v5: diameter 0.45, hole 0.2, Top Layer to Bottom Layer, tented both sides, 1 vias

## Nets (pads, with @x,y where several pads share a name; then routed paths per layer and width w, separated by ;. In a path a pad name is that pad's centre, name@x,y a point inside that pad or via, vN(x,y) a via of type N, cw(c..) or ccw(c..) an arc to the next point about the centre after c; other vN are vias at no path point)
1V8: C1.2 C9.2 C11.2 C13.2 C15.2 C18.2 C21.2 C25.2 C26.2 C35.1 C38.1 C42.1 C47.2 C53.2 C54.2 J1.1 L5.2 M1.A4 M1.B4 M1.D1 M1.E4 P4.1 R1.2 R5.2 R7.2 U1.2 U2.2 U5.A1 U5.A12 U5.A27 U5.A39 U6.13 U6.36 U6.48 | length 43.3
  Top Layer w0.1: R7.2@3.05,-1.35 C1.2@4.2,-1.35 ; v1(5.125,11.332) 5.162,11.332 M1.A4@5.729,11.9 ; U5.A1@12.45,16.05 12.438,16.05 12.15,16.338 12.15,17.1 v1(12.45,17.4) ; U5.A12@12.95,10.05 12.95,9.158 v1(12.958,9.15) ; v4(15.008,18.9) 15.008,17.592 15.759,16.841 15.759,16.609 U5.A39@15.7,16.55 ; U5.A27@18.95,12.75 20.193,12.75 v2(20.343,12.6) ; U6.13@21.171,31.475 v2(21.171,33)
  Top Layer w0.203: C1.2@4.25,-1.3 v1(5.509,-1.3) ; U1.2@4.254,5.225 5.168,5.225 5.35,5.407 v1(5.35,6.15) ; v1(5.65,17.22) v2(5.65,16.59) 5.729,16.511 M1.E4@5.729,15.9 ; v2(15.05,25.825) 15.475,26.25 U6.36@15.946,26.25 ; U6.48@21.171,25.425 21.171,25.067 21.438,24.8 v2(21.9,24.8)
  Top Layer w0.254: v2(4.278,12.4) 5.229,12.4 M1.B4@5.729,12.9 ; M1.D1@8.729,14.9 9.3,15.471 9.3,16.5 v1(9.55,16.75)
  Bottom Layer w0.1: v1(5.35,6.15) 5.931,5.569 R1.2@5.931,5.05 ; 11.48,16.86 C9.2@11.48,17.22 11.447,17.253 11.593,17.4 v1(12.45,17.4) ; C11.2@13.68,9.15 C11.2@13.7,9.13 ; v1@25.407,-2.25 v1(25.441,-2.215)
  Bottom Layer w0.203: U2.2@4.254,-1.3 v1(5.509,-1.3) ; C25.2@4.254,5.025 4.254,5.054 v1(5.35,6.15) ; C26.2@5.618,18.1 5.618,18.532 ; v1(5.65,17.22) C26.2@5.65,18.05 ; 5.662,18.532 C53.2@5.662,19.225 ; C15.2@14.595,18.044 15.008,18.456 v4(15.008,18.9) ; v2(15.05,25.825) 15.05,25.522 15.143,25.429 15.329,25.243 15.422,25.15 C38.1@15.922,25.15 ; C13.2@19.5,12.6 v2(20.343,12.6) ; v2(21.171,33) 21.222,32.949 C42.1@21.222,32.05 ; v2(21.9,24.8) C35.1@23.003,24.8 ; R5.2@24.243,-2.25 v1@25.407,-2.25
  Bottom Layer w0.254: C21.2@3.55,13 4.15,12.4 v2(4.278,12.4) ; C54.2@8.495,17.594 8.545,17.644 C18.2@9.57,17.644 9.55,17.624 v1(9.55,16.75) ; v1(12.958,9.15) C11.2@13.68,9.15 ; C42.1@21.171,32.101 C42.1@21.222,32.05
  Bottom Layer w0.305: L5.2@26.201,18.675 26.426,18.9 C47.2@28,18.9 ; v2(28,20.15) C47.2@28,18.9 ; v2(28.928,18.272) 28.928,18.663 28.691,18.9 C47.2@28,18.9
\C\S\1\0\: J1.0.2 M1.C2 | length 7.1
  Top Layer w0.1: v1(6.8,9.7) 6.8,8.798 7.198,8.4 J1.0.2@7.5,8.4 ; v1(7.375,14.248) 7.723,13.9 M1.C2@7.729,13.9
  Signal Layer 3 w0.1: v1(6.8,9.7) 6.8,13.673 v1(7.375,14.248)
\C\S\1\1\: J1.1.2 M1.A3 | length 6
  Top Layer w0.1: v1(5.8,9.3) 5.8,8.681 7.281,7.2 J1.1.2@7.6,7.2 ; v1(6.15,11.252) 6.729,11.832 M1.A3@6.729,11.9
  Signal Layer 3 w0.1: v1(5.8,9.3) 6.05,9.55 6.05,11.152 v1(6.15,11.252)
Cam_INT: U5.B40
Cam_TRIG: U5.A44
CHG_IN: C28.2 P1.2 R12.2 U7.4 | length 13.2
  Top Layer w0.15: U7.4@19.23,3.663 C28.2@21.317,3.663
  Top Layer w0.6: C28.2@21.317,3.413 23.963,3.413 29.69,9.14 P1.2@30.1,9.14
CHRGN: LED1.2 U7.2 | length 4.4
  Top Layer w0.1: LED1.2@17.48,2.05 LED1.2@17.517,2.013
  Top Layer w0.152: v1(16.317,4.383) 16.538,4.163 U7.2@17.405,4.163 ; v1(16.555,2.45) 17.08,2.45 17.48,2.05 LED1.2@17.55,2.05
  Bottom Layer w0.1: v1(16.317,4.383) 16.317,2.687 v1(16.555,2.45)
CK_N: M1.B1 U5.A15 | length 12.7
  Top Layer w0.1: M1.B1@8.729,12.9 8.729,12.479 8.45,12.2 8.45,9.339 9.156,8.634 9.6,8.634 9.841,8.634 9.841,8.837 10.195,8.837 10.195,8.634 10.549,8.634 10.549,8.837 10.903,8.837 10.903,8.634 11.257,8.634 11.257,8.837 11.611,8.837 11.611,8.634 11.965,8.634 11.965,8.837 12.319,8.837 12.319,8.634 12.673,8.634 12.85,8.634 13.706,8.634 14.6,9.528 U5.A15@14.6,10.05 U5.A15@14.55,10
CK_P: M1.B2 U5.B14 | length 12.7
  Top Layer w0.1: M1.B2@7.729,12.9 7.729,12.599 8.128,12.2 8.128,9.237 9.032,8.334 13.901,8.334 14.874,9.307 14.874,9.85 ; 14.876,9.85 14.876,10.525 U5.B14@14.95,10.6
CM_CHARGE_ENA: R15.2 R18.2 U7.5 | length 3.6
  Top Layer w0.15: U7.5@19.23,4.163 20.047,4.163 R15.2@20.267,4.383 20.267,6.836 R18.2@20.253,6.85
CM_CHARGE_I: C52.2 R13.2 U6.38 | length 21.5
  Top Layer w0.152: U6.38@17.171,25.425 17.171,24.779 v1(17.5,24.45) ; v1(18.7,7.9) 19.176,7.424 R13.2@19.176,6.918
  Signal Layer 1 w0.152: v1(18.7,7.9) 18.134,8.466 18.134,19.252 v1(19.028,20.146)
  Signal Layer 3 w0.152: v1(17.5,24.45) 19.311,22.639 19.311,20.429 v1(19.028,20.146)
  Bottom Layer w0.152: v1(18.7,7.9) 19.117,7.483 C52.2@19.117,6.913
DEC1: C44.1 U6.1 | length 3.6
  Top Layer w0.203: U6.1@21.996,26.25 22.2,26.25 23.45,25 C44.1@25.05,25
DEC2: C40.2 U6.32 | length 3.3
  Top Layer w0.203: C40.2@12.772,27.65 12.972,27.85 U6.32@15.946,27.85
DEC3: C39.1 U6.33 | length 3.5
  Top Layer w0.203: C39.1@12.737,26.65 13.322,26.65 14.122,27.45 U6.33@15.946,27.45
DEC4: C43.2 L2.1 U6.46 | length 9.4
  Top Layer w0.203: U6.46@20.371,25.425 20.375,25.421 20.375,23.875 21.5,22.75 L2.1@26.583,22.75 26.583,21.567 C43.2@26.6,21.55
DQ0: M1.D3 U5.D2 | length 10.3
  Top Layer w0.1: v1(6.2,15.45) 6.2,15.429 M1.D3@6.729,14.9 ; v1(10.927,9.85) 12.25,9.85 U5.D2@12.45,10.05
  Bottom Layer w0.1: v1(6.2,15.45) 6.2,14.726 9.276,11.65 9.874,11.65 10.85,10.674 10.85,9.927 v1(10.927,9.85)
DQ1: M1.D2 U5.A11 | length 10.7
  Top Layer w0.1: M1.D2@7.729,14.9 8.054,15.225 8.054,16.644 v2(7.999,16.7) ; v1(11.2,10.55) U5.A11@12.45,10.55
  Bottom Layer w0.1: v2(7.999,16.7) 7.999,15.046 10.15,12.895 10.15,12.071 11.2,11.021 v1(11.2,10.55)
DQ2: M1.C4 U5.B10 | length 10.6
  Top Layer w0.1: v1(5.2,13.45) 5.2,13.452 5.689,13.941 M1.C4@5.729,13.9 ; v1(9.237,10.1) 10.127,10.1 10.927,10.9 11.345,10.9 11.419,10.825 12.775,10.825 U5.B10@13,11.05
  Bottom Layer w0.1: v1(5.2,13.45) 5.2,13.173 8.273,10.1 v1(9.237,10.1)
DQ3: M1.D4 U5.A10 | length 10.1
  Top Layer w0.1: v1(5.229,15.4) M1.D4@5.729,14.9 ; v1(10.182,10.65) 10.632,11.1 U5.A10@12.45,11.1
  Bottom Layer w0.1: v1(5.229,15.4) 5.229,15.343 9.922,10.65 v1(10.182,10.65)
DQ4: M1.D5 U5.B8 | length 10.7
  Top Layer w0.1: M1.D5@4.729,14.9 4.729,14.968 5.198,14.499 v1(5.206,14.499) ; v1(8.955,11.1) 9.4,11.1 10.425,12.125 11.624,12.125 11.824,11.926 13,11.926 U5.B8@13,12.05
  Bottom Layer w0.1: v1(5.206,14.499) 5.206,14.423 5.701,14.423 8.955,11.169 v1(8.955,11.1)
DQ5: M1.E3 U5.A8 | length 10
  Top Layer w0.1: v1@6.65,16.75 6.65,15.813 M1.E3@6.743,15.907 ; v1(9.65,12.125) 10.039,12.125 10.239,12.325 11.8,12.325 11.925,12.2 U5.A8@12.45,12.2
  Bottom Layer w0.1: v1(6.65,16.752) 6.65,15.471 9.037,13.084 9.037,12.493 9.405,12.125 v1(9.65,12.125)
DQ6: M1.E2 U5.B7 | length 10
  Top Layer w0.1: v1(7.3,16.962) 7.3,16.329 M1.E2@7.729,15.9 ; v1(9.642,12.65) 11.793,12.65 11.967,12.476 13,12.476 U5.B7@13,12.55
  Bottom Layer w0.1: v1(7.3,16.962) 7.3,15.202 9.642,12.86 v1(9.642,12.65)
DQ7: M1.E1 U5.A9 | length 10.1
  Top Layer w0.1: v2(8.7,16.7) 8.7,15.94 8.735,15.905 M1.E1@8.729,15.9 ; v1(11.479,11.775) 11.604,11.65 U5.A9@12.45,11.65
  Bottom Layer w0.1: v2@8.75,16.735 8.729,16.714 8.729,16.466 8.729,16.289 9.499,16.289 9.499,15.935 8.729,15.935 8.729,15.581 8.729,15.395 8.855,15.27 9.105,15.019 9.355,14.769 9.57,14.984 9.82,14.733 9.606,14.519 9.856,14.269 9.955,14.17 9.955,14.155 10.16,13.95 10.174,13.95 10.251,13.873 10.251,13.077 11.479,11.848 v1(11.479,11.775)